# Altium PCB FT65E_SATA.PcbDoc
Units mm, origin at the board's own origin, x right, y up, seen from the top; angles counter-clockwise.
Board outline 30 x 25 mm, 4 copper layers (Top Layer, Layer 2, Layer 3, Bottom Layer), stack 1.513 mm thick; 29 components, 22 nets, 76 pads, 89 vias.
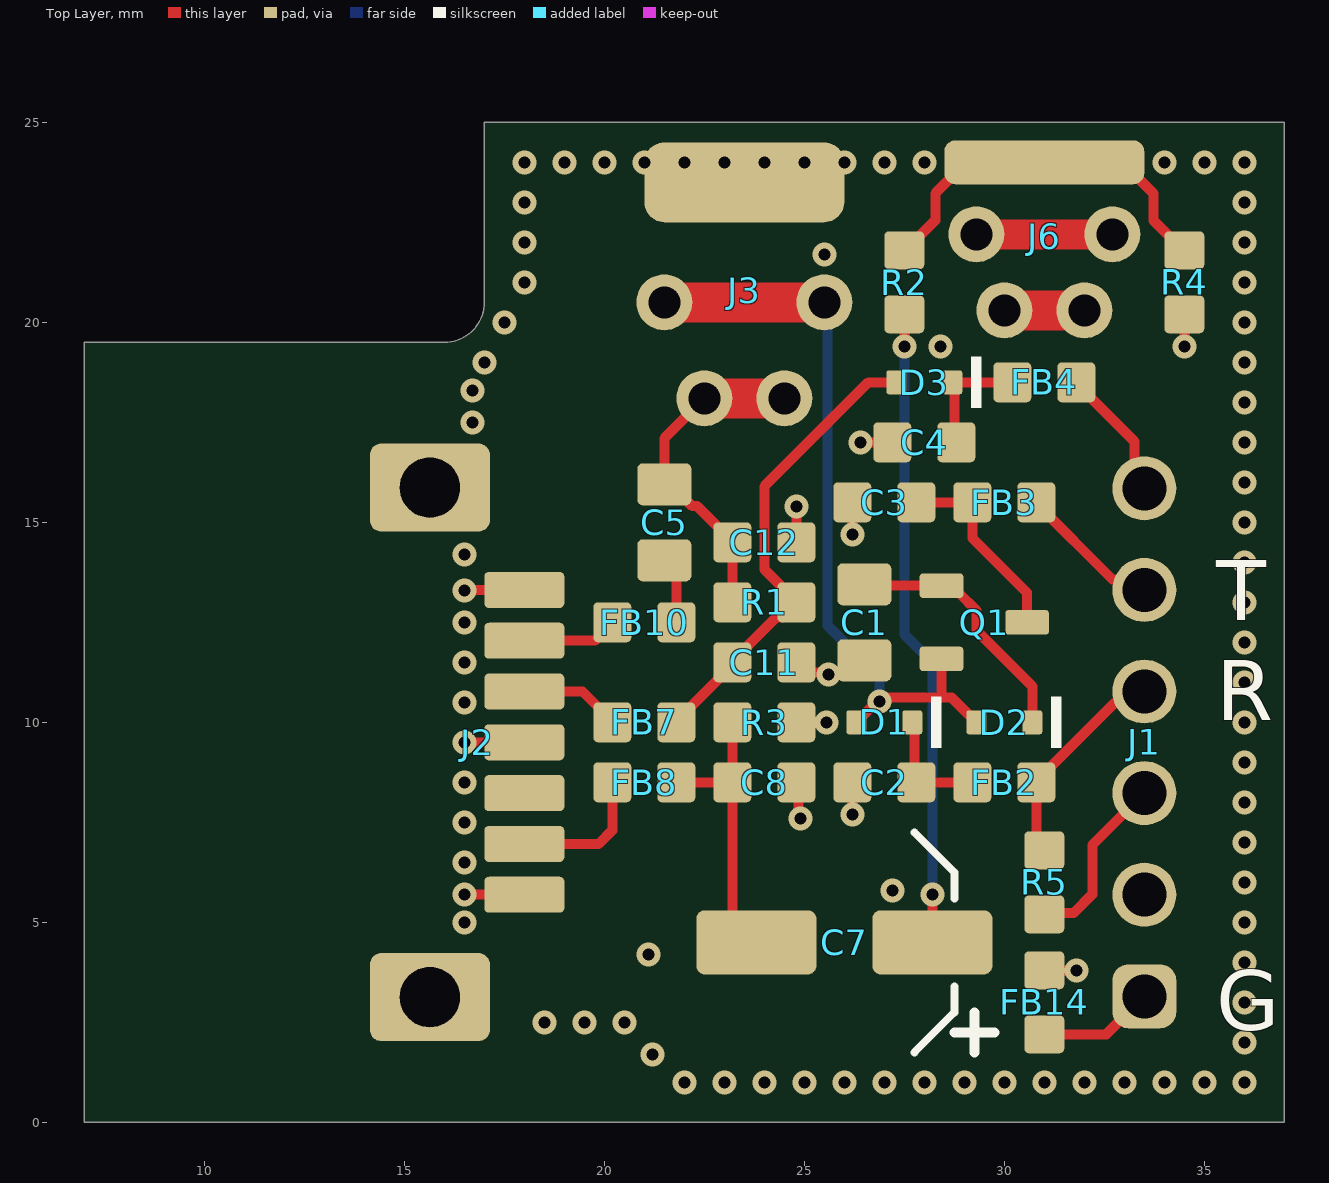
[diagram p0: Top Layer view]
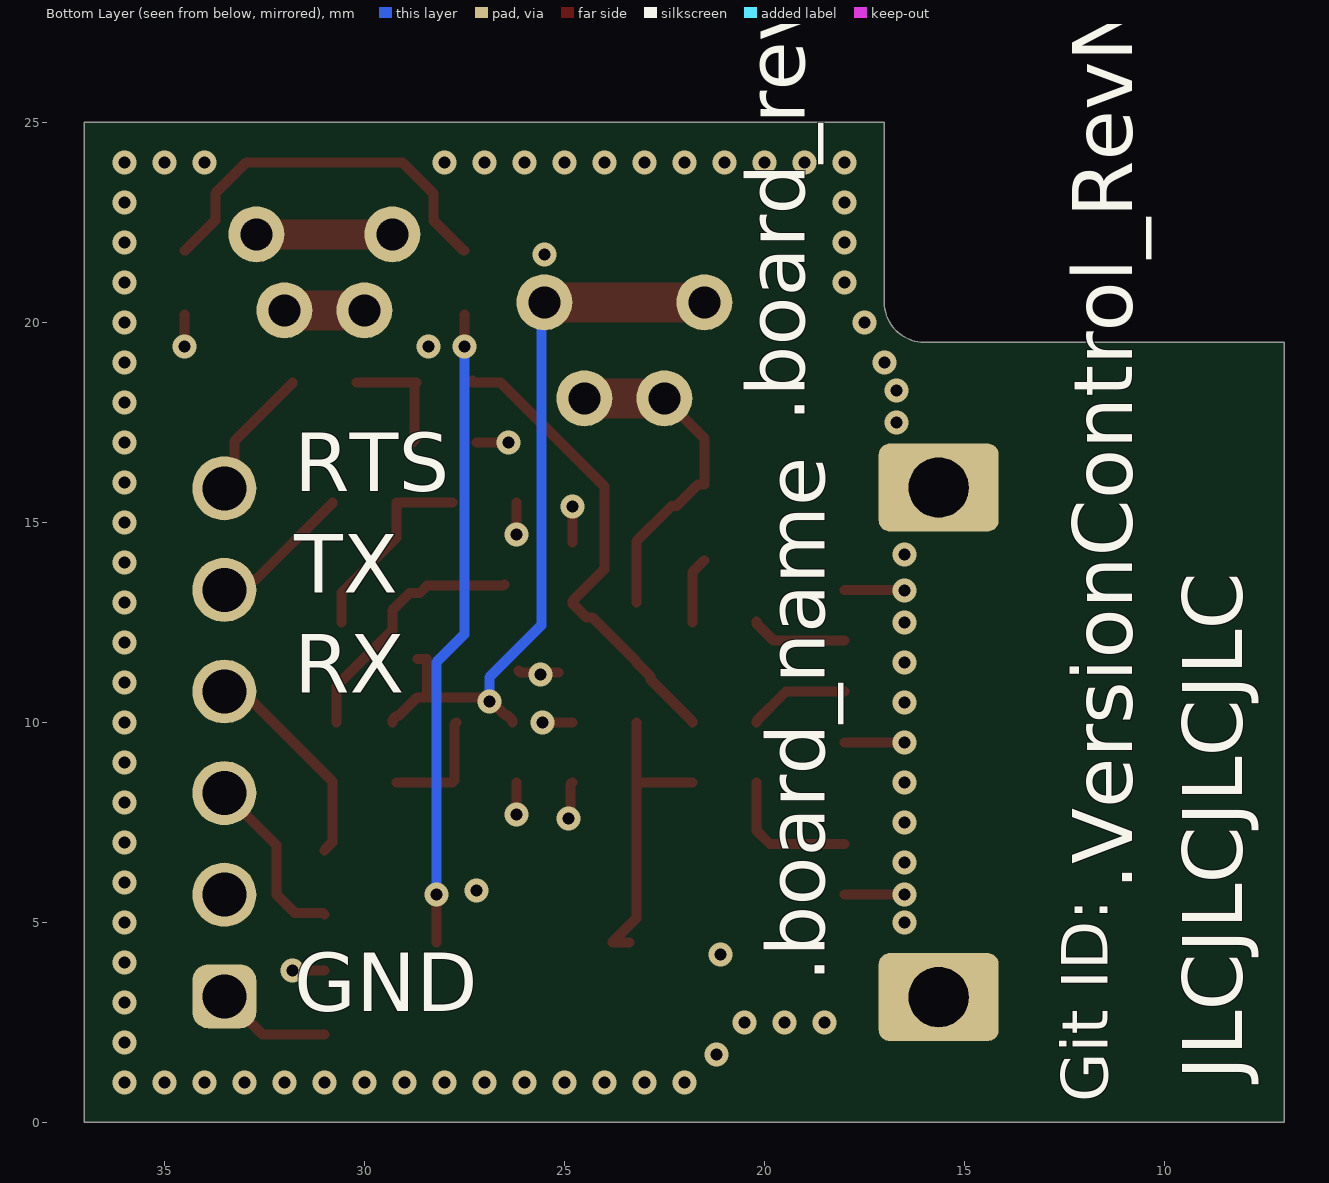
[diagram p1: Bottom Layer view, seen from below]
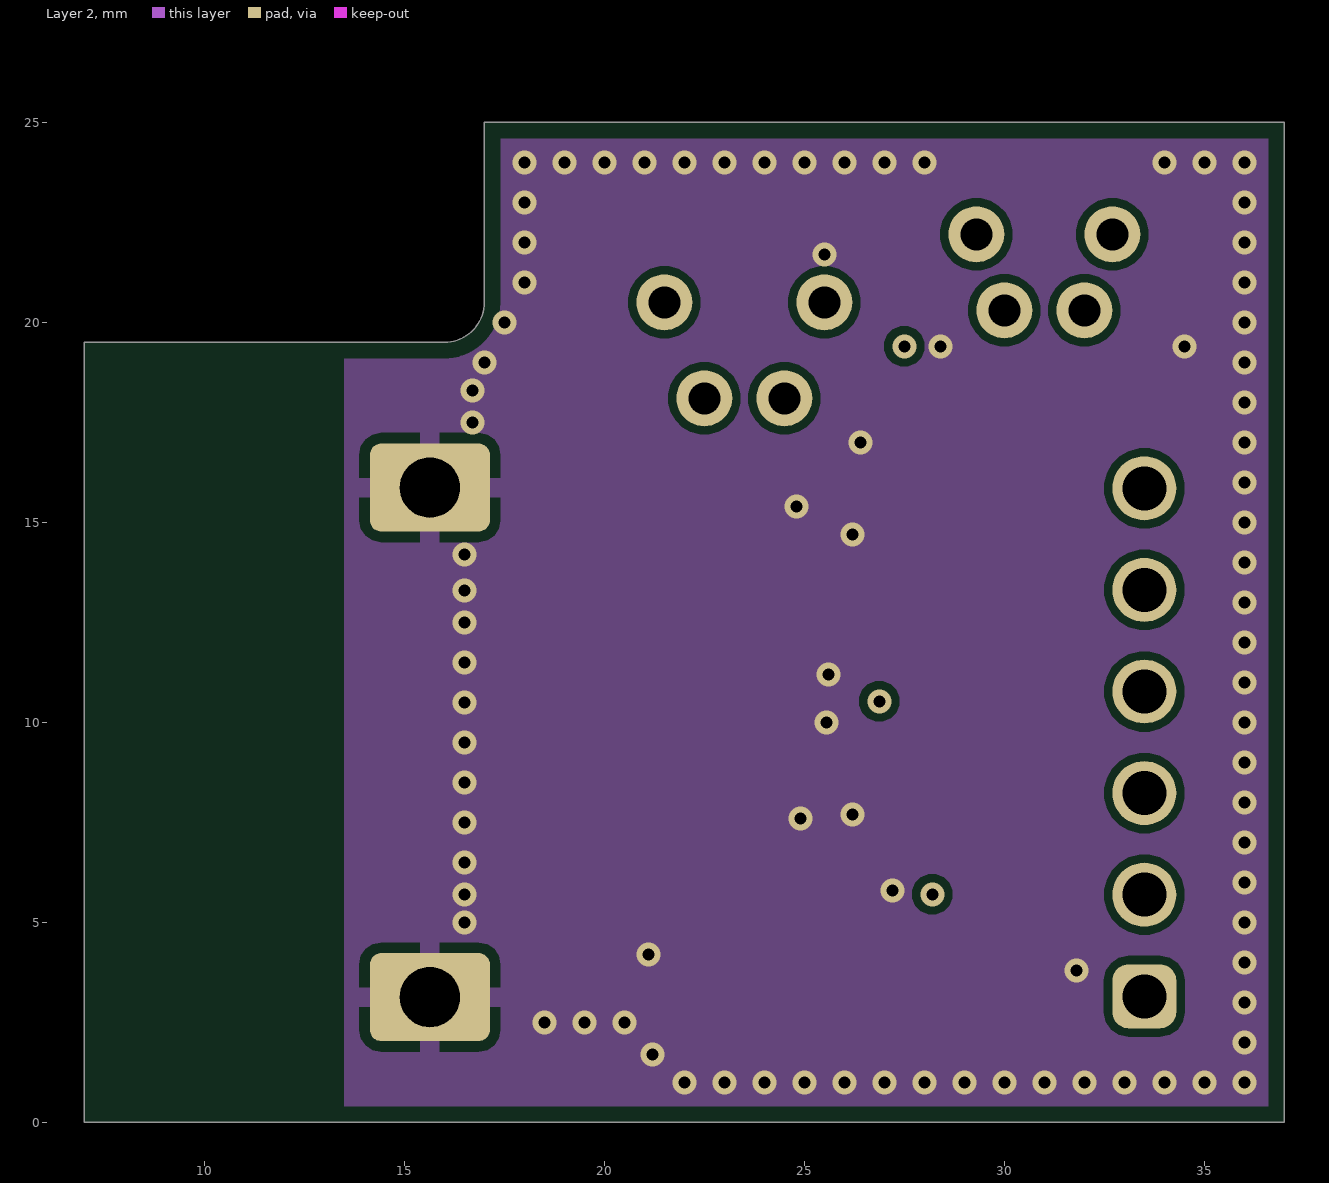
[diagram p2: Layer 2]
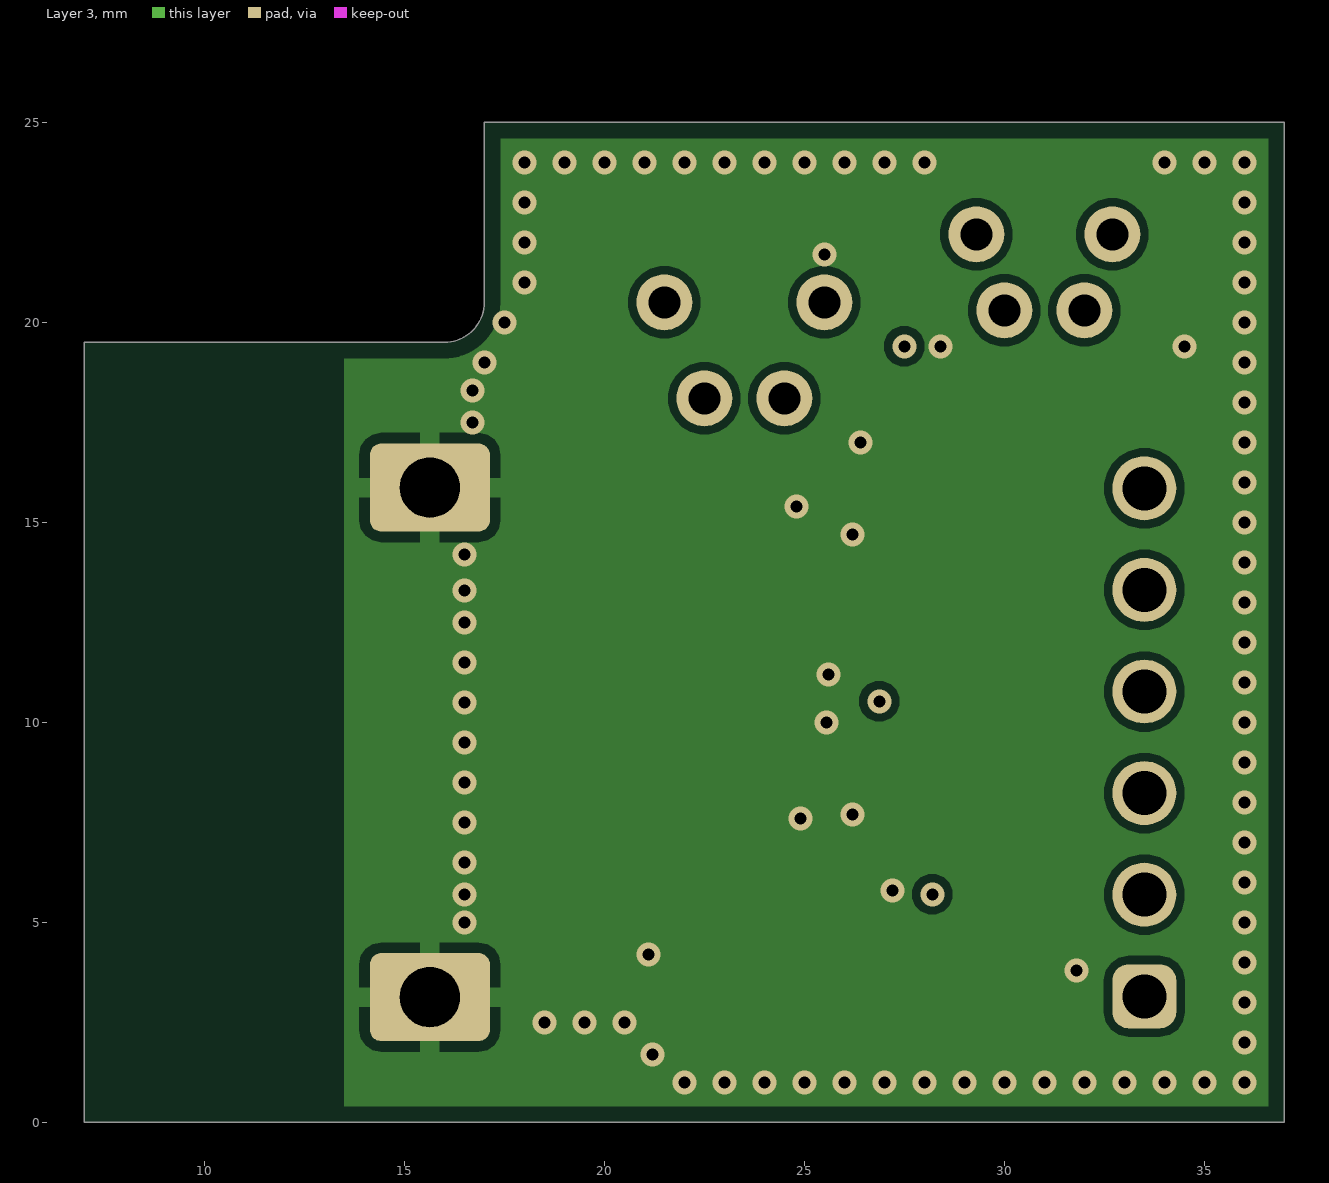
[diagram p3: Layer 3]
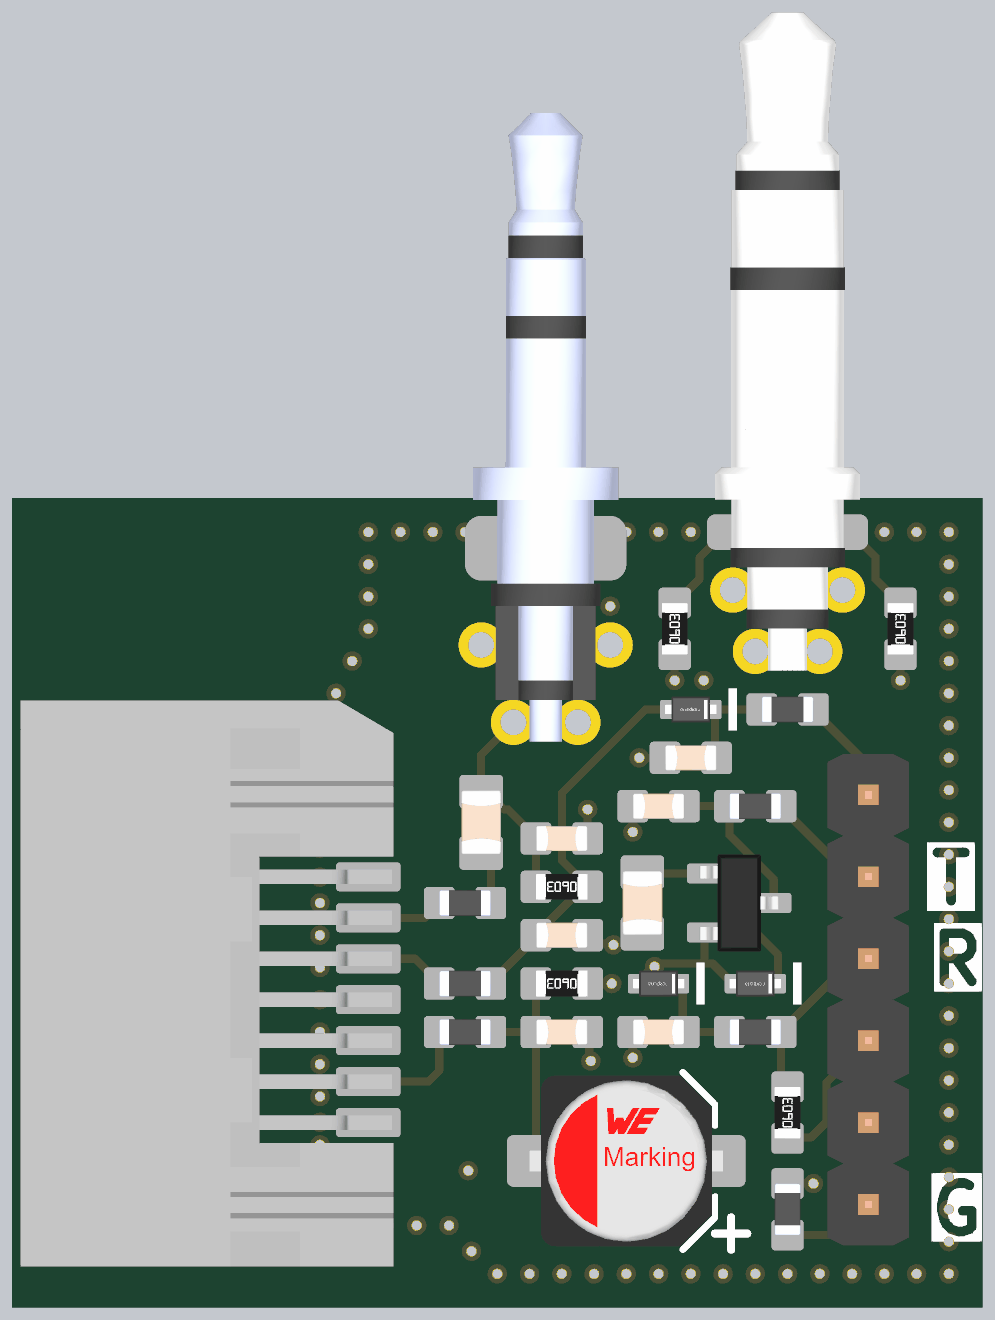
[diagram p4: 3D render of the assembled board from above, using the file's embedded part models]

## Layer stack, top to bottom
Top Solder: solder mask 0.0254, SM-001, Dk 4
Top Layer: signal copper 0.035
Dielectric 2: prepreg 0.2083, PP-022, Dk 4.5
Layer 2: signal copper 0.018
Dielectric 3: core 0.9906, Core-042, Dk 4.6
Layer 3: signal copper 0.018
Dielectric 5: prepreg 0.2083, PP-022, Dk 4.5
Bottom Layer: signal copper 0.035
Bottom Solder: solder mask 0.0254, SM-001, Dk 4

## Board outline
7,0 7,19.5 16,19.5 ccw(c16,20.5) 17,20.5 17,25 37,25 37,0

## Design rules (kind name [scope] priority, off if disabled: settings)
BoardOutlineClearance [IsElectrical or IsPoly] p1: gap=0.4 ignorepadtopadclearanceinfootprint=FALSE
Clearance Clearance_NTPH_to_Track [IsTrack vs IsPad and IsThruPin and not PadIsPlated] p1: gap=0.254 ignorepadtopadclearanceinfootprint=TRUE
Clearance Clearance_TH_Pad_to_TH_Pad [IsPad and IsThruPin vs IsPad and IsThruPin] p2: gap=0.5 ignorepadtopadclearanceinfootprint=TRUE
Clearance Clearance_SMT_Pad_to_SMT_Pad [IsPad and IsSMTPin vs IsPad and IsSMTPin] p3: gap=0.2 ignorepadtopadclearanceinfootprint=TRUE
Clearance [All] p4: gap=0.2 ignorepadtopadclearanceinfootprint=FALSE
DiffPairsRouting HDMI [InDifferentialPairClass('HDMI')] p1: maxlimit=0.254 minlimit=0.2 mostfreqgap=0.254 toplayer_maxgap=0.2 toplayer_prefgap=0.2 toplayer_minwidth=0.207 toplayer_maxwidth=0.207 toplayer_prefwidth=0.207 midlayer1_minwidth=0.381 midlayer1_maxwidth=0.381 midlayer1_prefwidth=0.381 midlayer2_minwidth=0.381 midlayer2_maxwidth=0.381 midlayer2_prefwidth=0.381 bottomlayer_maxgap=0.2 bottomlayer_prefgap=0.2 bottomlayer_minwidth=0.207 bottomlayer_maxwidth=0.207 bottomlayer_prefwidth=0.207 impedanceprofiledriven=TRUE impedanceprofileid={C10371E8-B84A-4044-89B9-1F0E894B0926} maxuncoupledlength=12.7
DiffPairsRouting ETH [InDifferentialPairClass('ETH')] p2: maxlimit=0.254 minlimit=0.2 mostfreqgap=0.254 toplayer_maxgap=0.2 toplayer_prefgap=0.2 toplayer_minwidth=0.207 toplayer_maxwidth=0.207 toplayer_prefwidth=0.207 midlayer1_minwidth=0.381 midlayer1_maxwidth=0.381 midlayer1_prefwidth=0.381 midlayer2_minwidth=0.381 midlayer2_maxwidth=0.381 midlayer2_prefwidth=0.381 bottomlayer_maxgap=0.2 bottomlayer_prefgap=0.2 bottomlayer_minwidth=0.207 bottomlayer_maxwidth=0.207 bottomlayer_prefwidth=0.207 impedanceprofiledriven=TRUE impedanceprofileid={C10371E8-B84A-4044-89B9-1F0E894B0926} maxuncoupledlength=12.7
DiffPairsRouting USB [InDifferentialPairClass('USB')] p3: maxlimit=0.2 minlimit=0.2 mostfreqgap=0.2 toplayer_minwidth=0.272 toplayer_maxwidth=0.272 toplayer_prefwidth=0.272 midlayer1_minwidth=0.381 midlayer1_maxwidth=0.381 midlayer1_prefwidth=0.381 midlayer2_minwidth=0.381 midlayer2_maxwidth=0.381 midlayer2_prefwidth=0.381 bottomlayer_minwidth=0.272 bottomlayer_maxwidth=0.272 bottomlayer_prefwidth=0.272 impedanceprofiledriven=TRUE impedanceprofileid={14A1D308-0AEB-453A-BA91-52939657512A} maxuncoupledlength=12.7
HoleSize NPTH_HoleSize [IsPad And not PadIsPlated] p1: absolutevalues=TRUE maxlimit=3.7 minlimit=0.2 maxpercent=80.000 minpercent=20.000
HoleSize Pad_HoleSize [IsPad] p2: absolutevalues=TRUE maxlimit=2.8 minlimit=0.5 maxpercent=80.000 minpercent=20.000
HoleSize Via_HoleSize [IsVia] p3: absolutevalues=TRUE maxlimit=6.3 minlimit=0.2 maxpercent=80.000 minpercent=20.000
HoleToHoleClearance [All] p1: gap=0.254 allowstackedmicrovias=FALSE
MatchedLengths InterPair_skew_HDMI [InDifferentialPairClass('HDMI')] p1: tolerance=1 checknetsindiffpair=FALSE checkdiffpairvsdiffpair=TRUE checkxsignals=TRUE checkothers=TRUE
MatchedLengths IntraPair_skew_all_DiffPairs [InDifferentialPairClass('All Differential Pairs')] p2: tolerance=0.15 checknetsindiffpair=TRUE checkdiffpairvsdiffpair=FALSE checkxsignals=FALSE checkothers=FALSE
MinimumAnnularRing [All] p1: minimumring=0.13
MinimumSolderMaskSliver [All] p1: minsoldermaskwidth=0.2
PolygonConnect [All] p1: thpad.connectstyle=Relief thpad.reliefconductorwidth=0.5 thpad.reliefentries=4 thpad.polygonreliefangle="90 Angle" thpad.airgapwidth=0.254 smdpad.connectstyle=Direct smdpad.reliefconductorwidth=0.5 smdpad.reliefentries=4 smdpad.polygonreliefangle="90 Angle" smdpad.airgapwidth=0.254 via.connectstyle=Direct via.reliefconductorwidth=0.5 via.reliefentries=4 via.polygonreliefangle="90 Angle" via.airgapwidth=0.254
RoutingVias [All] p1: holewidth=0.3 width=0.6 viastyle="Through Hole" minholewidth=0.2 minwidth=0.4 maxholewidth=0.711 maxwidth=1.27
SilkToSolderMaskClearance [IsPad] p1: minsilkscreentomaskgap=0.2 clearancetoexposedcopper=TRUE
SolderMaskExpansion SolderMaskExpansion_Via [IsVia] p1: expansion=0.102 istentingtop=TRUE
SolderMaskExpansion SolderMaskExpansion_notVia [not IsVia] p2: expansion=0.05 istentingtop=FALSE
Width [All] p1: maxlimit=2.5 minlimit=0.2 preferedwidth=0.33
25 further rules are at their usual default settings.

## Components (designator, comment, footprint, x,y, rotation, side; value= is the part's Value field where it differs from the comment)
C1 "Capacitor 1µF +/-10% 10V X7R 0805" 0805-C-N 26.5,12.5 r90 top value=1µF
C2 "Capacitor 3.3nF +/-10% 50V X7R 0603" 0603-C-N 27,8.5 r0 top value=3.3nF
C3 "Capacitor 3.3nF +/-10% 50V X7R 0603" 0603-C-N 27,15.5 r0 top value=3.3nF
C4 "Capacitor 3.3nF +/-10% 50V X7R 0603" 0603-C-N 28,17 r0 top value=3.3nF
C5 "Capacitor 1µF +/-10% 10V X7R 0805" 0805-C-N 21.5,15 r270 top value=1µF
C7 "865080142007" WCAP-ASLI_D5H5.5 26,4.5 r180 top
C8 "Capacitor 100nF +/-10% 50V X7R 0603" 0603-C-N 24,8.5 r180 top value=100nF
C11 "Capacitor 100nF +/-10% 50V X7R 0603" 0603-C-N 24,11.5 r180 top value=100nF
C12 "Capacitor 100nF +/-10% 50V X7R 0603" 0603-C-N 24,14.5 r180 top value=100nF
D1 "1PS79SB30,115" FP-SOD523-MFG 27,10 r180 top
D2 "1PS79SB30,115" FP-SOD523-MFG 30,10 r180 top
D3 "1PS79SB30,115" FP-SOD523-MFG 28,18.5 r180 top
FB2 "742861210" 0603-FB-N 30,8.5 r180 top value=1.8R
FB3 "742861210" 0603-FB-N 30,15.5 r180 top value=1.8R
FB4 "742861210" 0603-FB-N 31,18.5 r180 top value=1.8R
FB7 "742861210" 0603-FB-N 21,10 r0 top value=1.8R
FB8 "742861210" 0603-FB-N 21,8.5 r0 top value=1.8R
FB10 "742861210" 0603-FB-N 21,12.5 r0 top value=1.8R
FB14 "742861210" 0603-FB-N 31,3 r90 top value=1.8R
J1 "61300611121" 61300611121 33.5,9.5 r90 top
J2 "0470804001" 0470804001-Footprint-1 18,9.5 r90 top
J3 "SP-2533-01" SP-2533-01-Footprint-1 23.5,25 r90 top locked
J6 "SP-3533-01" SP-3533-01-Footprint-1 31,25 r90 top locked
Q1 "FDV301N" SOT-23-3-N 29.5,12.5 r0 top
R1 "Resistor 2k +/-1% 50V 0603" 0603-R-N 24,13 r180 top value=2k
R2 "Resistor 39R 0603 +/-1%, 0.1W" 0603-R-N 27.5,21 r90 top value=39R
R3 "Resistor 10k +/-1% 50V 0603" 0603-R-N 24,10 r180 top value=10k
R4 "Resistor 10k +/-1% 50V 0603" 0603-R-N 34.5,21 r90 top value=10k
R5 "Resistor 2k +/-1% 50V 0603" 0603-R-N 31,6 r90 top value=2k

## Footprints (in the part's own frame and the unit in brackets; to place one, negate y for a bottom-side part, rotate by r counter-clockwise, add the part's x,y. Pads: shape width x height; smd on the part's side, far side on the other; paste and mask are expansions set on the pad)
0603-C-N [mm]
  rrect25% 0.95x1 smd: 1(-0.8,0) 2(0.8,0)
  body extent -0.8,-0.4 0.8,0.4, height 0.81
0603-FB-N [mm]
  rrect25% 0.95x1 smd: 1(-0.8,0) 2(0.8,0)
  body extent -0.8,-0.4 0.8,0.4, height 0.8
0603-R-N [mm]
  rrect25% 0.95x1 smd: 1(-0.8,0) 2(0.8,0)
  body extent -0.8,-0.4 0.8,0.4, height 0.47
0805-C-N [mm]
  rrect25% 1.05x1.35 smd: 1(-0.95,0) 2(0.95,0)
  body extent -1,-0.63 1,0.63, height 1.26
0470804001-Footprint-1 [mm]
  rrect25% 0.9x2 smd: 1(-3.81,0) 2(-2.54,0) 3(-1.27,0) 4(0,0) 5(1.27,0) 6(2.54,0) 7(3.81,0)
  rrect25% 2.2x3 hole 1.5: MP1(-6.37,2.36) MP2(6.37,2.36)
  body extent -8.27,-0.78 9.27,10.78, height 5.86
61300611121 [mm] "Pin Header, pitch 2.54 mm, THT, Vertical, single row, 6p"
  rrect50% 1.6x1.6 hole 1.1: 1(-6.35,0)
  round 1.6 hole 1.1: 2(-3.81,0) 3(-1.27,0) 4(1.27,0) 5(3.81,0) 6(6.35,0)
  body extent -7.62,-1.27 7.62,1.27, height 8.57
FP-SOD523-MFG [mm]
  rrect25% 0.5x0.6 smd: 1(-0.7,0) 2(0.7,0)
  silkscreen extent -1.43,-0.65 -1.17,0.64, body extent -1.07,-0.6 1.07,0.6, height 0.25
SOT-23-3-N [mm] "SOT-23, 3-Leads, Body 3x1.4mm, Pitch 0.95mm, IPC Medium Density"
  rrect25% 1.09x0.61 smd: 1(-1.07,0.915) 2(-1.07,-0.915) 3(1.07,0)
  body extent -1.22,-1.5 1.22,1.5, height 1
SP-2533-01-Footprint-1 [mm]
  rrect50% 2x5 smd: 1(-1.5,0)
  round 1.4 hole 0.8: 2A(-6.9,1) 2B(-6.9,-1) 3A(-4.5,2) 3B(-4.5,-2)
  body extent -7.5,-2.24 12,2.24, height 3.96
SP-3533-01-Footprint-1 [mm]
  rrect50% 1.1x5 smd: 1(-1,0)
  round 1.4 hole 0.8: 2A(-4.7,1) 2B(-4.7,-1) 3A(-2.8,1.7) 3B(-2.8,-1.7)
  body extent -5.3,-2.24 15.1,2.24, height 3.84
WCAP-ASLI_D5H5.5 [mm] "Aluminium Electrolytic V-Chip SMT Capacitors, 5x5.5mm"
  rrect25% 3x1.6 smd: 1(-2.2,0) 2(2.2,0)
  silkscreen extent -3.75,-2.75 -1.75,2.75, body extent -3,-2.65 3,2.65, height 5.5

## Part data
C1 C5: library part CMP-072-000659-14, "WCAP-CSGP Multilayer Ceramic Chip Capacitor, General Purpose, size 0805, X7R, 1µF, 10VDC", Capacitor Type=MLCC, Case/Package=0805, Dielectric=X7R, Insulation Resistance=0.5GO, JLCPCB Part #=C28323, Max Operating Temperature=125°C, Min Operating Temperature=-55°C, Tolerance=10%, Voltage Rating=10V, ComponentLink1Description="Website Link", ComponentLink1URL=https://www.we-online.com/redexpert/article/885012207022?ad, ComponentLink2Description="Datasheet Link", ComponentLink2URL=https://www.we-online.com/redexpert/spec/885012207022?ad, Design Item ID=885012207022, Dissipation Factor=5%, Height=1.25mm, Length=2mm, Match Code=WCAP-CSGP, Mounting Technology=SMT, Packaging="Tape and Reel", Pins=2, Source=WCAP-CSGP.SchLib, Technical Reference=X7R0805105K010DFCT10000, Usage="General Purpose", Width=1.25mm
C2 C3 C4: library part CMP-072-000609-11, "WCAP-CSGP Multilayer Ceramic Chip Capacitor, General Purpose, size 0603, X7R, 3.3nF, 50VDC", Capacitor Type=MLCC, Case/Package=0603, Dielectric=X7R, Insulation Resistance=10GO, Max Operating Temperature=125°C, Min Operating Temperature=-55°C, Tolerance=10%, Voltage Rating=50V, ComponentLink1Description="Website Link", ComponentLink1URL=https://www.we-online.com/redexpert/article/885012206086?ad, ComponentLink2Description="Datasheet Link", ComponentLink2URL=https://www.we-online.com/redexpert/spec/885012206086?ad, Design Item ID=885012206086, Dissipation Factor=2.5%, Height=0.8mm, Length=1.6mm, Match Code=WCAP-CSGP, Mounting Technology=SMT, Packaging="Tape and Reel", Pins=2, Source=WCAP-CSGP.SchLib, Technical Reference=X7R0603332K050DFCT10000, Usage="General Purpose", Width=0.8mm
C7: library part CMP-112-000006-2, "WCAP-ASLI Aluminum Electrolytic Capacitor, V-Chip, D5 x H5.5mm, 100uF, 6.3V", Capacitance=100uF, Capacitance Tolerance=+/-20%, Leakage Current=6.3uA, Manufacturer="Wurth Elektronik", Operating Temperature Max=105°C, Operating Temperature Min=-55°C, Rated Voltage (DC)=6.3V, Ripple Current=170mA, Category="Aluminum Electrolytic Capacitors", Component Type=Standard, ComponentLink1Description="Website Link", ComponentLink1URL=https://www.we-online.com/redexpert/article/865080142007?ad, ComponentLink2Description="Datasheet Link", ComponentLink2URL=https://www.we-online.com/redexpert/spec/865080142007?ad, Design Item ID=865080142007, Diameter=5mm, Dissipation Factor=24%, Endurance=2000h, Height=5.5mm, Manufacturer Part Number=865080142007, Match Code=WCAP-ASLI, Mount="Surface Mount", Packaging="Tape and Reel", Pin Count=2, Source=WCAP-ASLI.SchLib, Technical Reference=ASEC055101M6R3DVCTBB000
C8 C11 C12: library part CMP-001-00017-20, "Capacitor MLCC, General Purpose, size 0603, X7R, 100nF, +/-10%, 50V", Capacitor Type=MLCC, Case/Package=0603, Dielectric=X7R, JLCPCB Part #=C14663, Max Operating Temperature=125°C, Min Operating Temperature=-55°C, Tolerance=10%, Voltage Rating=50V, Height=0.8mm, Length=1.6mm, Mounting Technology=SMT, Pins=2, RoHS Compliant=True, Usage="General Purpose", Width=0.8mm
D1 D2 D3: library part CMP-004-00048-7, "VR=40V IF=200mA 20pF", Case/Package=SOD-523, Forward Current=200mA, Forward Voltage="600 mV @ 200 mA", JLCPCB Part #=C426690, Max Repetitive Reverse Voltage (Vrrm)=40V, RoHS Compliant=Yes
FB2 FB3 FB4 FB7 FB8 FB10 FB14: library part CMP-006-00040-1, "Ferrite Beads Multi-Layer 1KOhm 25% 100MHz 50mA 1.8Ohm DCR 0603 T/R", Case Code (Imperial)=0603, Case Code (Metric)=1608, Case/Package=SMD/SMT, Max Current Rating=50mA, Max Operating Temperature=125°C, Min Operating Temperature=-55°C, Package Quantity=1, Test Frequency=100MHz, Tolerance=25%, Core Material=Ferrite, Depth=0.8mm, Height=0.8mm, Impedance=1kR, Length=1.6mm, Max DC Current=50mA, Mounting Technology="Surface Mount", Number of Lines=1, Packaging="Tape and Reel", Pins=2, Reach SVHC Compliant=Unknown, RoHS Compliant=Yes, Series="WE-CBF HF", Termination=SMD/SMT, Width=0.8mm
J1: library part CMP-045-000153-3, "WR-PHD Pin Header, THT, pitch 2.54mm, Single Row, Vertical, 6p", Contact Resistance=20mOhm, Manufacturer="Wurth Elektronik", Operating Temperature="-40 to +105degC", Rated Current=3A, Withstanding Voltage=500VAC, Working Voltage=250VAC, Component Type=Standard, ComponentLink1Description=Manufacturer, ComponentLink1URL=http://www.we-online.de, ComponentLink2Description=Datasheet, ComponentLink2URL=https://www.we-online.com/catalog/datasheet/61300611121.pdf, Design Item ID=61300611121, Gender="Pin Header", Manufacturer Part Number=61300611121, Mounting Technology=THT, Orientation=Vertical, Packaging=Bag, Pin Count=6, Pin Number=6, Pitch=2.54mm, Row Number=Single, Source="WR-PHD_Pin Header.SchLib"
J2: library part CMP-002-00132-1, "Header Connector, pcb Mount, recept, 7 Contacts, pin, 0.05 Pitch, surface Mount Terminal, locking", JLCPCB Part #=C587821, Max Operating Temperature=85°C, Min Operating Temperature=-35°C, Contact Material="Copper Alloy", Contact Plating=Gold, Depth=11.56mm, Housing Material=Plastic, Length=17.54mm, Number of Ports=1, Orientation="Right Angle", Packaging="Tape and Reel", Pitch=1.27mm, Termination=Solder
J3: library part CMP-002-00129-3, "2.5 mm, Stereo, Overmold, Audio Plug Connector", Current Rating=1A, Insulation Color=Black, Max Operating Temperature=70°C, Min Operating Temperature=-25°C, Body Material=Brass, Connector Type=Plug, Contact Material=Brass, Contact Plating=Nickel, Gender=Male, Mounting Technology="Free Hanging", Packaging=Bulk, Shielding=Unshielded, Termination=Solder
J6: library part CMP-002-00130-2, "3.5 mm, Stereo, Overmold, Audio Plug Connector", Current Rating=1A, Insulation Color=Black, Max Operating Temperature=70°C, Min Operating Temperature=-25°C, Body Material=Brass, Connector Type=Plug, Contact Material=Brass, Contact Plating=Nickel, Gender=Male, Housing Material=Brass, Mounting Technology="Free Hanging", Packaging=Bulk, RoHS Compliant=Yes, Shielding=Unshielded, Termination=Solder
Q1: library part CMP-013-00055-10, "Transistor MOSFET N-Ch. 25V 220mA 0, 35W 4Ohm SOT23", Case/Package=SOT-23-3, Continuous Drain Current (ID)=220mA, Drain to Source Resistance=5R, Drain to Source Voltage (Vdss)=25V, Gate to Source Voltage (Vgs)=8V, Input Capacitance=9.5pF, JLCPCB Part #=C15310, Max Operating Temperature=150°C, Max Power Dissipation=350mW, Min Operating Temperature=-55°C, Package Quantity=3000, Fall Time=6ns, Height=1.2mm, Id - Continuous Drain Current=220mA, Length=2.9mm, Mounting Technology="Surface Mount", Number of Channels=1, Packaging="Tape and Reel", Pins=3, Polarity=N-CHANNEL, Rds On Max=4R, Rise Time=6ns, Series=-, Transistor Type=NMOS, Turn-Off Delay Time=3.5ns, Turn-On Delay Time=3.2ns, Vds Max=25V, Vgs (Max)=8V, Vgs(th) (Max) @ Id="1.06V @250µA", Weight=0.001093oz, Width=1.3mm
R1 R5: library part CMP-009-00298-9, "Chip Resistor, Thick Film, General Purpose, 0603, 100mW, 50V, 2 kOhm, +/-1%", Case/Package=0603, JLCPCB Part #=C22975, Max Operating Temperature=155°C, Min Operating Temperature=-55°C, Power Rating=100mW, Resistor Type="Thick Film", Tolerance=1%, Voltage Rating=50V, Elements=1, Mounting Technology=SMT, Pins=2, Usage="General Purpose"
R2: library part CMP-009-00363-2, "SMD Chip Resistor, 39 Ohm, ± 1%, 100 mW, 0603 [1608 Metric], Thick Film, General Purpose", Case/Package=0603, JLCPCB Part #=C2907161, Max Operating Temperature=155°C, Min Operating Temperature=-55°C, Power Rating=100mW, Resistor Type="Thick Film", Temperature Coefficient=100ppm/°C, Tolerance=1%, Voltage Rating=50V, Elements=1, Features="Moisture Resistant", Lead Free="Lead Free", Mounting Technology=SMT, Pins=2, RoHS Compliant=Yes, Usage="General Purpose"
R3 R4: library part CMP-009-00017-24, "Chip Resistor, Thick Film, General Purpose, 0603, 100mW, 50V, 10 kOhm, +/-1%", Case/Package=0603, JLCPCB Part #=C25804, Max Operating Temperature=155°C, Min Operating Temperature=-55°C, Power Rating=100mW, Resistor Type="Thick Film", Tolerance=1%, Voltage Rating=50V, Elements=1, Mounting Technology=SMT, Pins=2, RoHS Compliant=Yes, Usage="General Purpose"

## Via types
v1: diameter 0.6, hole 0.3, Top Layer to Bottom Layer, tented both sides, 89 vias

## Nets (pads, with @x,y where several pads share a name; then routed paths per layer and width w, separated by ;. In a path a pad name is that pad's centre, name@x,y a point inside that pad or via, vN(x,y) a via of type N, cw(c..) or ccw(c..) an arc to the next point about the centre after c; other vN are vias at no path point)
GND: C1.1 C2.1 C3.1 C4.1 C8.1 C11.1 C12.1 FB14.2 J2.1 J2.4 J2.7 J2.MP1 J2.MP2 J3.1 R3.1 R4.1 | length 12.2
  Top Layer w0.25: v1(16.5,5.7) 16.505,5.695 17.995,5.695 J2.1 ; v1(16.5,9.5) J2.4 ; v1(16.5,13.3) 16.505,13.305 17.995,13.305 J2.7 ; C8.1 24.85,8.45 24.85,7.65 v1(24.9,7.6) ; R3.1 v1(25.55,10) ; C12.1 v1(24.8,15.4) ; C11.1@25.141,11.241 25.6,11.241 26.091,11.241 C1.1@26.15,11.3 ; v1(25.6,11.2) v1@25.641,11.241 ; v1(26.2,7.7) C2.1 ; v1(26.2,14.7) C3.1 ; v1(26.4,17) C4.1 ; FB14.2 v1(31.8,3.8) ; v1(34.5,19.4) R4.1
  other v1: 22,1 23,1 24,1 25,1 26,1 27,1 28,1 29,1 30,1 31,1 32,1 33,1 34,1 35,1 36,1 21.2,1.7 36,2 18.5,2.5 19.5,2.5 20.5,2.5 36,3 36,4 21.1,4.2 16.5,5 36,5 27.2,5.8 36,6 16.5,6.5 36,7 16.5,7.5 36,8 16.5,8.5 36,9 36,10 16.5,10.5 36,11 16.5,11.5 36,12 16.5,12.5 36,13 36,14 16.5,14.2 36,15 36,16 36,17 16.7,17.5 36,18 16.7,18.3 17,19 36,19 28.4,19.4 17.5,20 36,20 18,21 36,21 25.5,21.7 18,22 36,22 18,23 36,23 18,24 19,24 20,24 21,24 22,24 23,24 24,24 25,24 26,24 27,24 28,24 34,24 35,24 36,24
HEADPHONE_L: C7.2 C8.2 FB8.2 R3.2 | length 7.6
  Top Layer w0.25: FB8.2 C8.2 ; R3.2 C8.2 ; C7.2@23.369,4.5 C7.2 23.2,5.1 C8.2
HP_L: FB8.1 J2.2 | length 3.5
  Top Layer w0.25: J2.2 19.86,6.96 20.2,7.3 FB8.1
MIC: FB10.1 J2.6 | length 2.4
  Top Layer w0.25: J2.6 19.765,12.04 20.2,12.475 FB10.1 FB10.1@20.2,12.525
MIC_IN: C5.1 C12.2 J3.2A J3.2B R1.2 | length 8.5
  Top Layer w0.25: J3.2A 21.5,17.1 C5.1 21.653,15.95 22.2,15.404 22.321,15.404 23.2,14.525 C12.2 R1.2 ; J3.2B@24.4,18 J3.2B
  Top Layer w1: J3.2A J3.2B
NetC1_2: C1.2 D2.1 Q1.1 | length 6.4
  Top Layer w0.25: C1.2 26.535,13.415 Q1.1 28.61,13.235 28.865,13.235 29.3,12.8 29.3,12.3 30.7,10.9 D2.1
NetC2_2: C2.2 D1.1 FB2.2 | length 2.9
  Top Layer w0.25: D1.1 27.75,9.95 27.75,8.55 C2.2 FB2.2
NetC3_2: C3.2 FB3.2 Q1.3 | length 5
  Top Layer w0.25: C3.2 FB3.2 29.2,14.61 30.57,13.24 Q1.3
NetC4_2: C4.2 D3.1 FB4.2 | length 3
  Top Layer w0.25: C4.2 28.75,17.05 28.75,18.45 D3.1 FB4.2
NetC5_2: C5.2 FB10.2 | length 1.7
  Top Layer w0.25: C5.2 21.8,13.75 FB10.2
NetC7_1: C7.1 R2.1 | length 16
  Top Layer w0.25: v1(27.5,19.4) R2.1 ; C7.1 v1(28.2,5.7)
  Bottom Layer w0.25: v1(27.5,19.4) 27.5,12.2 28.2,11.5 v1(28.2,5.7)
NetFB14_1: FB14.1 J1.1 | length 2.9
  Top Layer w0.25: FB14.1 32.55,2.2 J1.1
NetJ6_2: J6.2A J6.2B | length 2
  Top Layer w1: J6.2A J6.2B
NetJ6_3: J6.3A J6.3B | length 3.4
  Top Layer w0.75: J6.3A J6.3B
PTT: C11.2 D3.2 FB7.2 R1.1 | length 12
  Top Layer w0.25: FB7.2 21.8,10.025 22.85,11.075 22.85,11.15 C11.2 23.2,11.525 24.3,12.625 24.45,12.625 24.8,12.975 R1.1 24.8,13.025 24,13.825 24,15.9 26.6,18.5 D3.2 D3.2@27.3,18.55
PTT_IN: FB7.1 J2.5 | length 2.5
  Top Layer w0.25: J2.5 19.455,10.77 20.2,10.025 FB7.1
RTS: FB4.1 J1.6 | length 3.4
  Top Layer w0.25: FB4.1 31.8,18.475 33.25,17.025 33.25,16.1 J1.6
RX: FB2.1 J1.4 R5.2 | length 5.4
  Top Layer w0.25: R5.2 30.8,7 FB2.1 30.8,8.525 32.787,10.512 33.242,10.512 J1.4
SPK_L: J6.1 R2.2 R4.2 | length 9.6
  Top Layer w0.25: R2.2 27.525,21.8 28.275,22.55 28.275,23.225 29.05,24 J6.1 32.95,24 33.725,23.225 33.725,22.55 34.475,21.8 R4.2
TRX: D1.2 D2.2 J3.3A J3.3B Q1.2 | length 19.3
  Top Layer w0.25: D1.2 26.3,10.05 26.425,10.175 26.475,10.175 26.825,10.525 v1(26.875,10.525) ; v1@26.875,10.625 28.4,10.625 ; Q1.2@28.67,11.585 Q1.2 28.43,10.655 28.4,10.625 ; D2.2 29.3,10.05 29.175,10.175 29.125,10.175 28.675,10.625 28.4,10.625
  Top Layer w1: J3.3A J3.3B
  Bottom Layer w0.25: J3.3B 25.575,20.425 25.575,12.425 26.875,11.125 v1(26.875,10.525)
TX: FB3.1 J1.5 | length 3.6
  Top Layer w0.25: FB3.1 30.8,15.475 32.707,13.568 33.242,13.568 J1.5
VCC: J1.3 R5.1 | length 4.5
  Top Layer w0.25: R5.1 31.029,5.229 31.729,5.229 32.2,5.7 32.2,6.93 J1.3
pads on no net: J1.2 J2.3

## Polygon pours and split planes (outlines as drawn)
GND on Layer 2 "GND_L02_P000" (solid, remove dead copper, pour order 0): 13.5,26 13.5,-1 37.4,-1 37.4,26
GND on Layer 3 "NONET_L-01_P-001" (solid, remove dead copper, pour order 1): 13.5,27 13.5,-1.7 38.1,-1.7 38.1,27

## Silkscreen, mask and mechanical layers (free items; w line width, h text height)
Top Overlay:
  text "T" at 35.3,12.55 h1.5
  text "R" at 35.3,10.05 h1.5
  text "G" at 35.3,2.3 h1.5
Bottom Overlay:
  text ".board_revision" at 18.5,17.5 h2.5 r270
  text "RTS" at 31.75,15.287 h2.5
  text "TX" at 31.75,12.75 h2.5
  text "RX" at 31.75,10.25 h2.5
  text ".VersionControl_RevNumberShort" at 10.8,5.8 h1.5 r270
  text ".board_name" at 18,3.5 h2.5 r270
  text "GND" at 31.75,2.287 h2.5
  text "JLCJLCJLCJLC" at 8.05,1.05 h1.5 r270
  text "Git ID:" at 11.03,0.5 h2 r270
Board outline:
  the board outline again, w0.1
Fab Notes:
  drawing of 295 lines, arcs and shapes, not listed
  text "Layer" at 57.469,67.481 h1.52
  text "Name" at 67.88,67.481 h1.52
  text "Material" at 91.496,67.481 h1.52
  text "Thickness" at 106.732,67.481 h1.52
  text "Constant" at 123.238,67.481 h1.52
  text "Board Layer Stack" at 137.712,67.481 h1.52
  text "Top Overlay" at 67.88,64.433 h1.52
  text "Top Solder" at 67.88,61.385 h1.52
  text "SM-001" at 91.496,61.385 h1.52
  text "0.025mm" at 106.732,61.385 h1.52
  text "4" at 123.238,61.385 h1.52
  text "1" at 57.469,58.337 h1.52
  text "Top Layer" at 67.88,58.337 h1.52
  text "CF-004" at 91.496,58.337 h1.52
  text "0.035mm" at 106.732,58.337 h1.52
  text "Dielectric 2" at 67.88,55.289 h1.52
  text "PP-022" at 91.496,55.289 h1.52
  text "0.208mm" at 106.732,55.289 h1.52
  text "4.5" at 123.238,55.289 h1.52
  text "2" at 57.469,52.241 h1.52
  text "Layer 2" at 67.88,52.241 h1.52
  text "CF-003" at 91.496,52.241 h1.52
  text "0.018mm" at 106.732,52.241 h1.52
  text "Dielectric 3" at 67.88,49.193 h1.52
  text "Core-042" at 91.496,49.193 h1.52
  text "0.991mm" at 106.732,49.193 h1.52
  text "4.6" at 123.238,49.193 h1.52
  text "3" at 57.469,46.145 h1.52
  text "Layer 3" at 67.88,46.145 h1.52
  text "CF-003" at 91.496,46.145 h1.52
  text "0.018mm" at 106.732,46.145 h1.52
  text "Dielectric 5" at 67.88,43.097 h1.52
  text "PP-022" at 91.496,43.097 h1.52
  text "0.208mm" at 106.732,43.097 h1.52
  text "4.5" at 123.238,43.097 h1.52
  text "4" at 57.469,40.049 h1.52
  text "Bottom Layer" at 67.88,40.049 h1.52
  text "CF-004" at 91.496,40.049 h1.52
  text "0.035mm" at 106.732,40.049 h1.52
  text "Bottom Solder" at 67.88,37.001 h1.52
  text "SM-001" at 91.496,37.001 h1.52
  text "0.025mm" at 106.732,37.001 h1.52
  text "4" at 123.238,37.001 h1.52
  text "Bottom Overlay" at 67.88,33.953 h1.52
  text "Soldermask color : green / Silkscreen color : white / Surface finish : Pb-free HASL / Via covering : tented / Board outline clearance : +/- 0.2mm / PCB Order Nr : replace JLCJLCJLCJLC by correct order nr." at 54.8,1 h6